# EAGLE board BuckpuckBreakoutv2_noshield (EAGLE 5.11)

Size 100 x 80 mm. Coordinates in mm from the lower left corner, seen from the top.
Outline: 0,0 100,0 100,80 0,80 0,0
Copper layers (1*16): Top 0.035mm / dielectric 1.5mm / Bottom 0.035mm
Design rules "default": minimum track width 10mil, minimum drill 24mil, track to track 8mil, track to pad 8mil, pad to pad 8mil, via to via 8mil, smd to smd 8mil, copper to edge 40mil, drill to drill 8mil, minimum pad ring 10mil, minimum via ring 8mil, stop-mask expansion 4mil, vias tented up to drill 0mil, thermal gap 10mil

## Footprints (pad centres in the part's own frame; a part is rotated, then mirrored left to right if it is on the bottom)
W237-102 = drill 1.194 long: 1 -2.5,-1.27; 2 2.5,-1.27
CPOL-RADIAL-1000UF-63V = drill 1.016 pad 1.651 square: 1 3.81,0 | drill 1.016 pad 1.676 round: 2 -3.81,0
DIL14 = drill 0.813 long: 1 -7.62,-3.81; 2 -5.08,-3.81; 3 -2.54,-3.81; 4 0,-3.81; 5 2.54,-3.81; 6 5.08,-3.81; 7 7.62,-3.81; 8 7.62,3.81; 9 5.08,3.81; 10 2.54,3.81; 11 0,3.81; 12 -2.54,3.81; 13 -5.08,3.81; 14 -7.62,3.81
1X08 = drill 1.016 pad 1.88 square: 1 0,0 | drill 1.016 pad 1.88 round: 2 2.54,0; 3 5.08,0; 4 7.62,0; 5 10.16,0; 6 12.7,0; 7 15.24,0; 8 17.78,0
DIL16 = drill 0.813 offset: 1 -8.89,-3.81; 2 -6.35,-3.81; 3 -3.81,-3.81; 4 -1.27,-3.81; 5 1.27,-3.81; 6 3.81,-3.81; 7 6.35,-3.81; 8 8.89,-3.81; 9 8.89,3.81; 10 6.35,3.81; 11 3.81,3.81; 12 1.27,3.81; 13 -1.27,3.81; 14 -3.81,3.81; 15 -6.35,3.81; 16 -8.89,3.81
RTRIMT93YB = drill 0.61 round: 1 1.27,-2.54; 2 -1.27,0; 3 1.27,2.54
AXIAL-0.4 = drill 0.9 pad 1.88 round: P$1 -5.08,0; P$2 5.08,0
02P = drill 0.914 long: 1 -1.27,0; 2 1.27,0
22-23-2061 = drill 1 long: 1 -6.35,0; 2 -3.81,0; 3 -1.27,0; 4 1.27,0; 5 3.81,0; 6 6.35,0

## Placement (x,y rotation side)
24VDC  [W237-102]  6.35,6.35 0 top
C1  220uF  [CPOL-RADIAL-1000UF-63V]  40.64,8.89 0 top
C2  220uF  [CPOL-RADIAL-1000UF-63V]  57.15,8.89 0 top
C3  220uF  [CPOL-RADIAL-1000UF-63V]  74.93,8.89 0 top
C4  220uF  [CPOL-RADIAL-1000UF-63V]  91.44,8.89 0 top
IC1  74AC00N  [DIL14]  24.13,68.58 270 top
JP1  [1X08]  78.74,29.21 0 top
JP2  [1X08]  57.15,29.21 0 top
JP3  [1X08]  35.56,29.21 0 top
JP4  [1X08]  13.97,29.21 0 top
OK1  PC847  [DIL16]  64.77,57.15 180 top
R1  5K  [RTRIMT93YB]  86.36,38.1 0 top
R2  5K  [RTRIMT93YB]  66.04,38.1 0 top
R3  5K  [RTRIMT93YB]  44.45,38.1 0 top
R4  5K  [RTRIMT93YB]  22.86,38.1 0 top
R5  330  [AXIAL-0.4]  38.1,76.2 180 top
R6  330  [AXIAL-0.4]  38.1,60.96 180 top
R7  330  [AXIAL-0.4]  38.1,66.04 180 top
R8  330  [AXIAL-0.4]  38.1,71.12 180 top
SL1  [02P]  93.98,34.29 0 top
SL2  [02P]  73.66,35.56 0 top
SL3  [02P]  52.07,34.29 0 top
SL4  [02P]  30.48,35.56 0 top
X1  [22-23-2061]  6.35,68.58 90 top

## Library data of the parts
24VDC = con-wago-500
C1-C4 JP1-JP4 R5-R8 = SparkFun
IC1 = 74xx-eu
OK1 = optocoupler; OC_FARNELL: 9707735; OC_NEWARK: unknown
R1-R4 = resistor
SL1-SL4 = con-amp-quick
X1 = con-molex; MF: MOLEX; MPN: 22-23-2061; OC_FARNELL: 1462922; OC_NEWARK: 27C1933

## Nets
24V: 24VDC.1 C1.1 C2.1 C3.1 C4.1 JP1.3 JP2.3 JP3.3 JP4.3
GND: IC1.7 OK1.2 OK1.4 OK1.6 OK1.8 X1.2
LED+_1: JP1.7 JP1.8 SL1.1
LED+_2: JP2.7 JP2.8 SL2.1
LED+_3: JP3.7 JP3.8 SL3.1
LED+_4: JP4.7 JP4.8 SL4.1
LED-_1: JP1.6 SL1.2
LED-_2: JP2.6 SL2.2
LED-_3: JP3.6 SL3.2
LED-_4: JP4.6 SL4.2
N$1: OK1.1 R5.P$1
N$2: IC1.3 R5.P$2
N$3: IC1.6 R6.P$2
N$4: IC1.1 IC1.2 X1.3
N$5: IC1.4 IC1.5 X1.4
N$6: IC1.9 IC1.10 X1.5
N$7: IC1.12 IC1.13 X1.6
N$8: IC1.11 R8.P$2
N$9: OK1.7 R8.P$1
N$10: IC1.8 R7.P$2
N$11: OK1.5 R7.P$1
N$12: OK1.3 R6.P$1
N$13: JP2.4 OK1.14 R2.3
N$14: JP1.4 OK1.16 R1.3
N$15: JP1.5 OK1.15 R1.1 R1.2
N$16: JP2.5 OK1.13 R2.1 R2.2
N$17: JP3.5 OK1.11 R3.1 R3.2
N$18: JP3.4 OK1.12 R3.3
N$19: JP4.4 OK1.10 R4.3
N$20: JP4.5 OK1.9 R4.1 R4.2
N$26: 24VDC.2 C1.2 C2.2 C3.2 C4.2 JP1.1 JP2.1 JP3.1 JP4.1
VCC: IC1.14 X1.1

## Tracks (layer width: path | path; a pad name or v marks a point on that pad's centre or on a via)
24V  (8 unrouted)
GND  (5 unrouted)
LED+_1  (2 unrouted)
LED+_2  (2 unrouted)
LED+_3  (2 unrouted)
LED+_4  (2 unrouted)
LED-_1  (1 unrouted)
LED-_2  (1 unrouted)
LED-_3  (1 unrouted)
LED-_4  (1 unrouted)
N$1  (1 unrouted)
N$2  (1 unrouted)
N$3  (1 unrouted)
N$4  (2 unrouted)
N$5  (2 unrouted)
N$6  (2 unrouted)
N$7  (2 unrouted)
N$8  (1 unrouted)
N$9  (1 unrouted)
N$10  (1 unrouted)
N$11  (1 unrouted)
N$12  (1 unrouted)
N$13  (2 unrouted)
N$14  (2 unrouted)
N$15  (3 unrouted)
N$16  (3 unrouted)
N$17  (3 unrouted)
N$18  (2 unrouted)
N$19  (2 unrouted)
N$20  (3 unrouted)
N$26  (8 unrouted)
VCC  (1 unrouted)